# EAGLE board Layout (EAGLE 9.1.3)
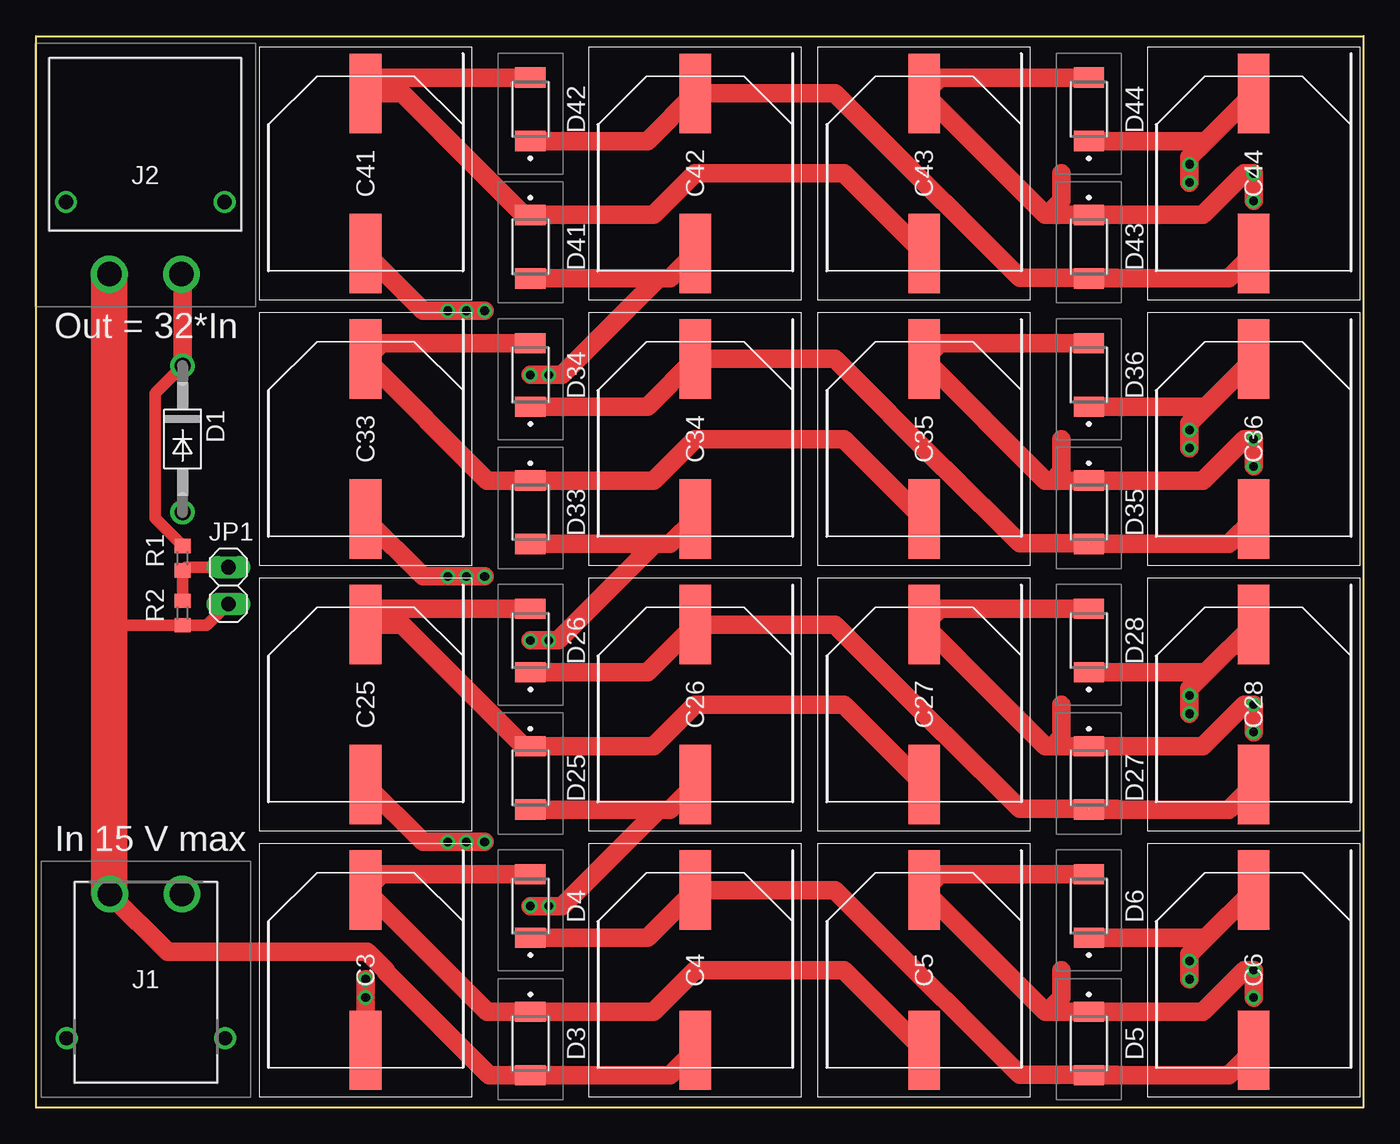
[diagram p0: board, top side]
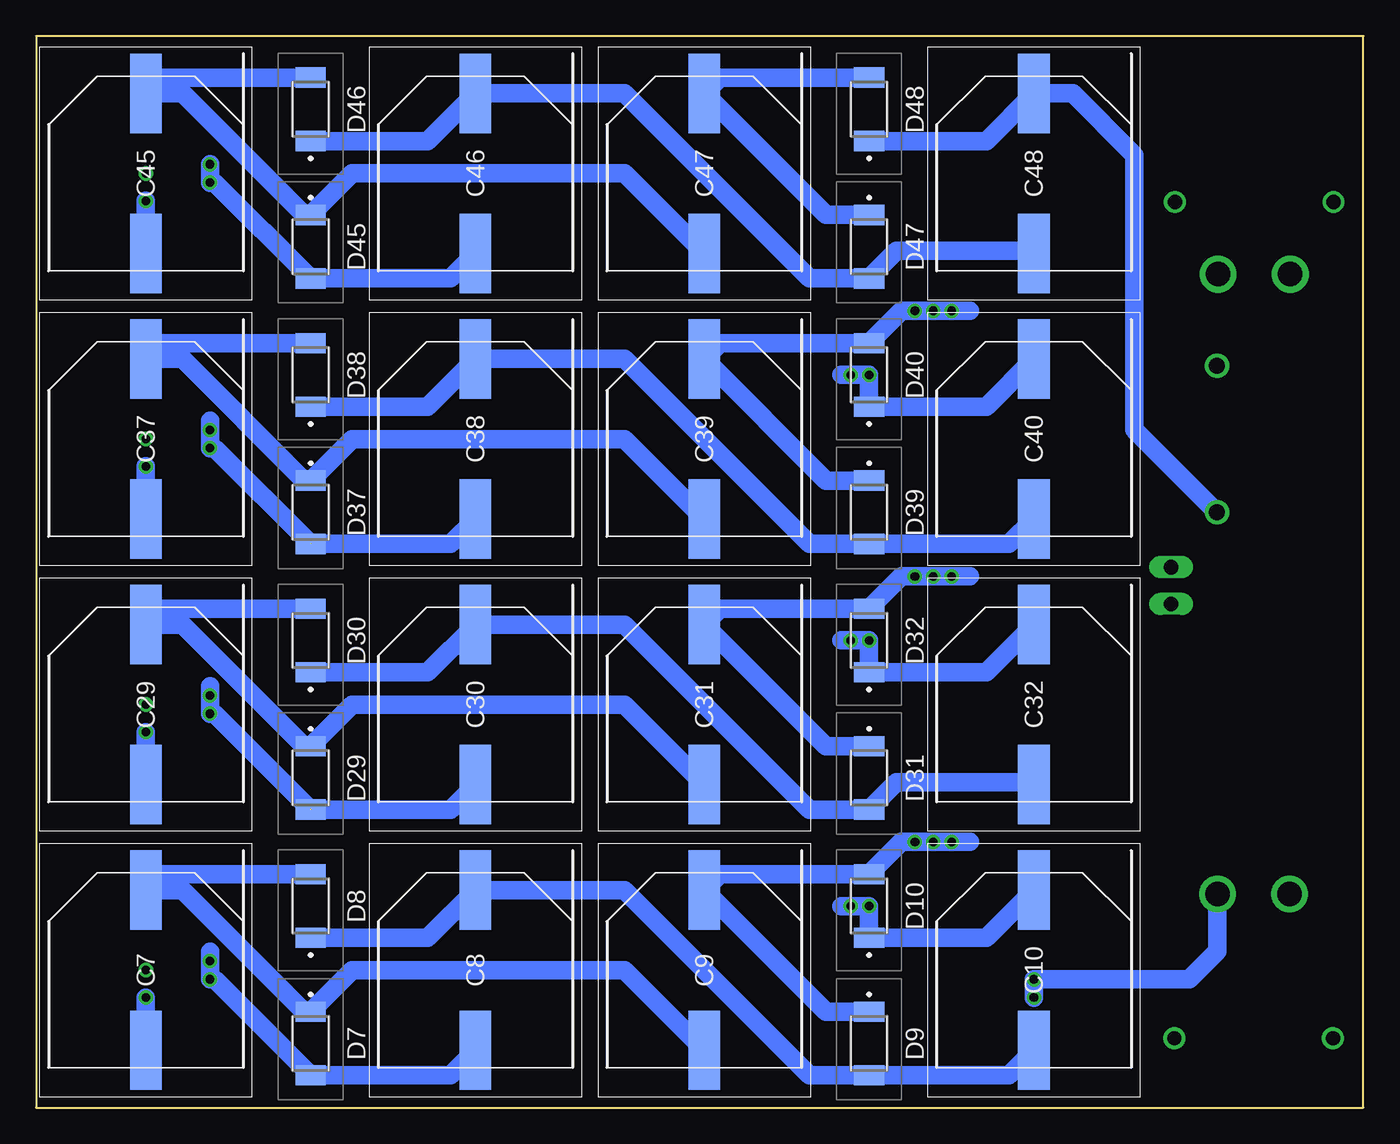
[diagram p1: board, bottom side, seen from below]

Size 92.08 x 74.3 mm. Coordinates in mm from the lower left corner, seen from the top.
Outline: 0,0 0,74.3 92.08,74.3 92.08,0 0,0
Copper layers (1*16): Top 0.035mm / dielectric 1.5mm / Bottom 0.035mm
Design rules "default": minimum track width 6mil, minimum drill 0.35mm, track to track 6mil, track to pad 6mil, pad to pad 6mil, via to via 6mil, smd to smd 6mil, copper to edge 40mil, drill to drill 6mil, minimum pad ring 10mil, minimum via ring 8mil, stop-mask expansion 4mil, vias tented up to drill 0mil, thermal gap 10mil

## Footprints (pad centres in the part's own frame; a part is rotated, then mirrored left to right if it is on the bottom)
CAPAE1350X1400N = smd 5.5 x 2.2: 1 -5.55,0; 2 5.55,0
DO41-10 = drill 1.118: A 5.08,0; C -5.08,0
PMEG3050EP115 = smd 1.4 x 2.1: 1 -2.2,0; 2 2.2,0
XT30PWM = drill 1.7 pad 2.55: 1 -2.5,-5.912; 2 2.5,-5.912 | drill 1 pad 1.5: 3 5.5,4.088; 4 -5.5,4.088
XT30PWF = drill 1.7 pad 2.55: 1 0,0; 2 5,0 | drill 1 pad 1.5: 3 -3,5; 4 8,5
1X02 = drill 1.016 long: 1 -1.27,0; 2 1.27,0
R0603 = smd 1 x 1.1: 1 -0.85,0; 2 0.85,0

## Placement (x,y rotation side)
C3  AFK108M25H32T-F  [CAPAE1350X1400N]  22.86,9.53 270 top
C4  AFK108M25H32T-F  [CAPAE1350X1400N]  45.72,9.53 270 top
C5  AFK108M25H32T-F  [CAPAE1350X1400N]  61.6,9.53 270 top
C6  AFK108M25H32T-F  [CAPAE1350X1400N]  84.45,9.53 270 top
C7  AFK108M25H32T-F  [CAPAE1350X1400N]  84.45,9.53 270 bottom
C8  AFK108M25H32T-F  [CAPAE1350X1400N]  61.6,9.53 270 bottom
C9  AFK108M25H32T-F  [CAPAE1350X1400N]  45.72,9.53 270 bottom
C10  AFK108M25H32T-F  [CAPAE1350X1400N]  22.86,9.53 270 bottom
C25  AFK108M25H32T-F  [CAPAE1350X1400N]  22.86,27.94 270 top
C26  AFK108M25H32T-F  [CAPAE1350X1400N]  45.72,27.94 270 top
C27  AFK108M25H32T-F  [CAPAE1350X1400N]  61.6,27.94 270 top
C28  AFK108M25H32T-F  [CAPAE1350X1400N]  84.45,27.94 270 top
C29  AFK108M25H32T-F  [CAPAE1350X1400N]  84.45,27.94 270 bottom
C30  AFK108M25H32T-F  [CAPAE1350X1400N]  61.6,27.94 270 bottom
C31  AFK108M25H32T-F  [CAPAE1350X1400N]  45.72,27.94 270 bottom
C32  AFK108M25H32T-F  [CAPAE1350X1400N]  22.86,27.94 270 bottom
C33  AFK108M25H32T-F  [CAPAE1350X1400N]  22.86,46.35 270 top
C34  AFK108M25H32T-F  [CAPAE1350X1400N]  45.72,46.35 270 top
C35  AFK108M25H32T-F  [CAPAE1350X1400N]  61.6,46.35 270 top
C36  AFK108M25H32T-F  [CAPAE1350X1400N]  84.45,46.35 270 top
C37  AFK108M25H32T-F  [CAPAE1350X1400N]  84.45,46.35 270 bottom
C38  AFK108M25H32T-F  [CAPAE1350X1400N]  61.6,46.35 270 bottom
C39  AFK108M25H32T-F  [CAPAE1350X1400N]  45.72,46.35 270 bottom
C40  AFK108M25H32T-F  [CAPAE1350X1400N]  22.86,46.35 270 bottom
C41  AFK108M25H32T-F  [CAPAE1350X1400N]  22.86,64.77 270 top
C42  AFK108M25H32T-F  [CAPAE1350X1400N]  45.72,64.77 270 top
C43  AFK108M25H32T-F  [CAPAE1350X1400N]  61.6,64.77 270 top
C44  AFK108M25H32T-F  [CAPAE1350X1400N]  84.45,64.77 270 top
C45  AFK108M25H32T-F  [CAPAE1350X1400N]  84.45,64.77 270 bottom
C46  AFK108M25H32T-F  [CAPAE1350X1400N]  61.6,64.77 270 bottom
C47  AFK108M25H32T-F  [CAPAE1350X1400N]  45.72,64.77 270 bottom
C48  AFK108M25H32T-F  [CAPAE1350X1400N]  22.86,64.77 270 bottom
D1  1N4004  [DO41-10]  10.16,46.35 270 top
D3  PMEG3050EP,115  [PMEG3050EP115]  34.29,4.45 270 top
D4  PMEG3050EP,115  [PMEG3050EP115]  34.29,13.97 90 top
D5  PMEG3050EP,115  [PMEG3050EP115]  73.02,4.45 270 top
D6  PMEG3050EP,115  [PMEG3050EP115]  73.02,13.97 90 top
D7  PMEG3050EP,115  [PMEG3050EP115]  73.02,4.45 270 bottom
D8  PMEG3050EP,115  [PMEG3050EP115]  73.02,13.97 90 bottom
D9  PMEG3050EP,115  [PMEG3050EP115]  34.29,4.45 270 bottom
D10  PMEG3050EP,115  [PMEG3050EP115]  34.29,13.97 90 bottom
D25  PMEG3050EP,115  [PMEG3050EP115]  34.29,22.86 270 top
D26  PMEG3050EP,115  [PMEG3050EP115]  34.29,32.38 90 top
D27  PMEG3050EP,115  [PMEG3050EP115]  73.02,22.86 270 top
D28  PMEG3050EP,115  [PMEG3050EP115]  73.02,32.38 90 top
D29  PMEG3050EP,115  [PMEG3050EP115]  73.02,22.86 270 bottom
D30  PMEG3050EP,115  [PMEG3050EP115]  73.02,32.38 90 bottom
D31  PMEG3050EP,115  [PMEG3050EP115]  34.29,22.86 270 bottom
D32  PMEG3050EP,115  [PMEG3050EP115]  34.29,32.38 90 bottom
D33  PMEG3050EP,115  [PMEG3050EP115]  34.29,41.27 270 top
D34  PMEG3050EP,115  [PMEG3050EP115]  34.29,50.8 90 top
D35  PMEG3050EP,115  [PMEG3050EP115]  73.02,41.27 270 top
D36  PMEG3050EP,115  [PMEG3050EP115]  73.02,50.8 90 top
D37  PMEG3050EP,115  [PMEG3050EP115]  73.02,41.27 270 bottom
D38  PMEG3050EP,115  [PMEG3050EP115]  73.02,50.8 90 bottom
D39  PMEG3050EP,115  [PMEG3050EP115]  34.29,41.27 270 bottom
D40  PMEG3050EP,115  [PMEG3050EP115]  34.29,50.8 90 bottom
D41  PMEG3050EP,115  [PMEG3050EP115]  34.29,59.69 270 top
D42  PMEG3050EP,115  [PMEG3050EP115]  34.29,69.22 90 top
D43  PMEG3050EP,115  [PMEG3050EP115]  73.02,59.69 270 top
D44  PMEG3050EP,115  [PMEG3050EP115]  73.02,69.22 90 top
D45  PMEG3050EP,115  [PMEG3050EP115]  73.02,59.69 270 bottom
D46  PMEG3050EP,115  [PMEG3050EP115]  73.02,69.22 90 bottom
D47  PMEG3050EP,115  [PMEG3050EP115]  34.29,59.69 270 bottom
D48  PMEG3050EP,115  [PMEG3050EP115]  34.29,69.22 90 bottom
J1  XT30PW-M  [XT30PWM]  7.62,8.89 180 top
J2  XT30PW-F  [XT30PWF]  5.08,57.78 0 top
JP1  [1X02]  13.33,36.2 270 top
R1  [R0603]  10.16,38.1 90 top
R2  [R0603]  10.16,34.29 90 top

## Library data of the parts
C3-C10 C25-C48 = AFK158M16H32T-F; ARROW_PART_NUMBER: AFK108M25H32T-F; DESCRIPTION: Aluminium Electrolytic Capacitors - SMD 25V 1000uF 12.5X13.5 AEC-Q200; HEIGHT: 14mm; MANUFACTURER_NAME: Cornell Dubilier; MANUFACTURER_PART_NUMBER: AFK108M25H32T-F; MOUSER_PART_NUMBER: 5985-AFK25V1000-F; MOUSER_PRICE-STOCK: https://www.mouser.co.uk/ProductDetail/Cornell-Dubilier-CDE/AFK108M25H32T-F?qs=lmvG2hi1dvjyxC4H6cSnyg%3D%3D
D1 = diode
D3-D10 D25-D48 = PMEG3050EP_115; ARROW_PART_NUMBER: PMEG3050EP,115; ARROW_PRICE-STOCK: https://www.arrow.com/en/products/pmeg3050ep115/nexperia; DESCRIPTION: NXP PMEG3050EP,115 SMT Schottky Diode, 30V 5A, 2-Pin SOD-128; HEIGHT: 1mm; MANUFACTURER_NAME: Nexperia; MANUFACTURER_PART_NUMBER: PMEG3050EP,115; MOUSER_PART_NUMBER: 771-PMEG3050EP115; MOUSER_PRICE-STOCK: https://www.mouser.co.uk/ProductDetail/Nexperia/PMEG3050EP115?qs=GcY6OjH1zdmnjQ%2FhUT5aOA%3D%3D
J1 = XT30PW-M; ARROW_PART_NUMBER: XT30PW-M; DESCRIPTION: 30A Low Temperature Rise Fire Retardant Plug; HEIGHT: 5mm; MANUFACTURER_NAME: Amass; MANUFACTURER_PART_NUMBER: XT30PW-M
J2 = XT30PW-F; ARROW_PART_NUMBER: XT30PW-F; DESCRIPTION: Socket; DC supply; XT30; female; PIN:2; on PCBs; THT; Colour: yellow; HEIGHT: 5mm; MANUFACTURER_NAME: Amass; MANUFACTURER_PART_NUMBER: XT30PW-F
JP1 = pinhead
R1 R2 = eagle-ltspice; SPICEMODEL: NONE; SPICEPREFIX: R

## Nets
0: C4.2 D3.2 J1.2 J2.1 JP1.2 R2.1
N$1: D1.C J2.2 R1.2
N$2: JP1.1 R1.1 R2.2
N$5: C3.1 C5.2 D3.1 D4.2
N$8: C3.2 J1.1
N$9: C5.1 C7.2 D5.1 D6.2
N$10: C4.1 C6.2 D4.1 D5.2
N$11: C6.1 C8.2 D6.1 D7.2
N$12: C9.1 C25.2 D9.1 D10.2
N$14: C8.1 C10.2 D8.1 D9.2
N$15: C10.1 C26.2 D10.1 D25.2
N$16: C7.1 C9.2 D7.1 D8.2
N$29: C33.1 C35.2 D33.1 D34.2
N$31: C25.1 C27.2 D25.1 D26.2
N$32: C31.1 C33.2 D31.1 D32.2
N$33: C35.1 C37.2 D35.1 D36.2
N$34: C27.1 C29.2 D27.1 D28.2
N$35: C26.1 C28.2 D26.1 D27.2
N$36: C28.1 C30.2 D28.1 D29.2
N$38: C30.1 C32.2 D30.1 D31.2
N$39: C32.1 C34.2 D32.1 D33.2
N$40: C29.1 C31.2 D29.1 D30.2
N$41: C34.1 C36.2 D34.1 D35.2
N$42: C36.1 C38.2 D36.1 D37.2
N$43: C39.1 C41.2 D39.1 D40.2
N$44: C38.1 C40.2 D38.1 D39.2
N$45: C40.1 C42.2 D40.1 D41.2
N$46: C37.1 C39.2 D37.1 D38.2
N$47: C41.1 C43.2 D41.1 D42.2
N$48: C43.1 C45.2 D43.1 D44.2
N$49: C42.1 C44.2 D42.1 D43.2
N$50: C44.1 C46.2 D44.1 D45.2
N$51: C47.1 D47.1 D48.2
N$52: C46.1 C48.2 D46.1 D47.2
N$53: C48.1 D1.A D48.1
N$54: C45.1 C47.2 D45.1 D46.2

## Tracks (layer width: path | path; a pad name or v marks a point on that pad's centre or on a via)
0
  Top 0.813: 5.08,33.66 5.29,33.44 R2.1 11.85,33.44 JP1.2
  Top 1.27: C4.2 43.99,2.25 D3.2 31.41,2.25 24.28,9.37 24.28,9.48 22.97,10.79 9.13,10.79 J1.2
  Top 2.54: J2.1 5.08,33.66 5.08,14.84 J1.2
N$1
  Top 0.813: R1.2 8.26,40.85 8.26,49.53 D1.C
  Top 1.27: J2.2 10.16,57.7 D1.C
N$2
  Top 0.813: R2.2 R1.1 10.38,37.47 JP1.1
N$5
  Top 1.27: D4.2 23.95,16.17 C3.1 31.29,6.64 D3.1 42.84,6.64 45.72,9.53 56.05,9.53 C5.2
N$8  (via drill 0.6)
  Top 1.27: C3.2 22.85,3.96 C3.2 | v22.86,8.89 v22.86,7.62 C3.2
  Bottom 1.27: v22.86,7.62 v22.86,8.89 12.06,8.89 10.12,10.84 J1.1
N$9  (via drill 0.6)
  Top 1.27: D6.2 62.69,16.17 C5.1 70.02,6.64 | 70.02,6.64 D5.1 80.94,6.64 83.82,9.53 v84.45,9.53 v84.45,7.62 | 71.12,8.89 71.12,7.62 | 71.12,9.53 71.12,7.62 | 71.12,7.62 70.14,6.64 70.02,6.64
  Bottom 1.27: C7.2 v84.45,7.62
N$10
  Top 1.27: C6.2 82.72,2.25 D5.2 73.02,2.29 | D4.1 42.42,11.77 C4.1 55.41,15.07 62.97,7.51 63.02,7.51 68.25,2.29 73.02,2.29 | 74.93,2.29 73.02,2.29
N$11  (via drill 0.6)
  Top 1.27: D6.1 81.15,11.77 | 81.15,11.77 C6.1 | v80.01,8.89 v80.01,10.16 80.01,10.63 81.15,11.77
  Bottom 1.27: C8.2 63.33,2.25 D7.2 79.67,8.89 v80.01,8.89 v80.01,10.16 80.01,10.79
N$12  (via drill 0.6)
  Top 1.27: C25.2 26.84,18.41 v28.57,18.41 v29.84,18.41 v31.11,18.41
  Bottom 1.27: D9.1 37.29,6.64 C9.1 44.62,16.17 D10.2 32.05,18.41 v31.11,18.41 v29.84,18.41 v28.57,18.41 27.3,18.41
N$14
  Bottom 1.27: C10.2 24.59,2.25 D9.2 38.44,2.25 51.27,15.07 C8.1 64.9,11.77 D8.1
N$15  (via drill 0.6)
  Top 1.27: D25.2 43.18,20.66 | 43.18,20.66 43.99,20.66 C26.2 | 43.18,20.66 36.49,13.97 v35.56,13.97 v34.29,13.97
  Bottom 1.27: 22.86,17.14 C10.1 26.16,11.77 27.94,11.77 D10.1 v34.29,13.97 v35.56,13.97 36.2,13.97
N$16
  Bottom 1.27: D8.2 83.36,16.17 C7.1 81.91,15.07 73.48,6.64 D7.1 70.14,9.53 51.27,9.53 C9.2
N$29
  Top 1.27: D34.2 23.95,53 C33.1 31.29,43.48 D33.1 42.84,43.48 45.72,46.35 56.05,46.35 C35.2
N$31
  Top 1.27: D26.2 23.95,34.59 C25.1 25.4,33.49 33.83,25.06 D25.1 42.84,25.06 45.72,27.94 56.05,27.94 C27.2
N$32  (via drill 0.6)
  Top 1.27: C33.2 26.84,36.83 v28.57,36.83 v29.84,36.83 v31.11,36.83
  Bottom 1.27: D31.1 37.29,25.06 C31.1 44.62,34.59 D32.2 32.05,36.83 v31.11,36.83 v29.84,36.83 v28.57,36.83 27.3,36.83
N$33  (via drill 0.6)
  Top 1.27: D36.2 62.69,53 C35.1 70.02,43.48 70.48,43.48 | 70.48,43.48 D35.1 80.94,43.48 83.82,46.35 v84.45,46.35 v84.45,44.45 | 71.12,45.72 71.12,44.45 | 71.12,46.35 71.12,44.45 | 71.12,44.45 71.12,44.11 70.48,43.48
  Bottom 1.27: C37.2 v84.45,44.45
N$34  (via drill 0.6)
  Top 1.27: D28.2 62.69,34.59 C27.1 70.02,25.06 70.48,25.06 | 70.48,25.06 D27.1 80.94,25.06 83.82,27.94 v84.45,27.94 v84.45,26.04 | 71.12,27.3 71.12,26.04 | 71.12,27.94 71.12,26.04 | 71.12,26.04 71.12,25.7 70.48,25.06
  Bottom 1.27: C29.2 v84.45,26.04
N$35  (1 unrouted)
  Top 1.27: C28.2 82.72,20.66 D27.2 | D26.1 42.42,30.18 C26.1 55.41,33.49 62.97,25.93 63.02,25.93 68.25,20.7 73.02,20.7 74.93,20.7
N$36  (via drill 0.6)
  Top 1.27: D28.1 81.15,30.18 | 81.15,30.18 C28.1 | v80.01,27.3 v80.01,28.57 80.01,29.05 81.15,30.18
  Bottom 1.27: C30.2 63.33,20.66 D29.2 79.67,27.3 v80.01,27.3 v80.01,28.57 80.01,29.21
N$38
  Bottom 1.27: D30.1 64.9,30.18 C30.1 51.27,33.49 38.44,20.66 D31.2 32.38,22.57 23.04,22.57 C32.2
N$39  (via drill 0.6)
  Top 1.27: D33.2 41.91,39.08 | 41.91,39.08 43.18,39.08 | 43.18,39.08 43.99,39.08 C34.2 | v34.29,32.38 v35.56,32.38 36.2,32.38 41.91,38.1 | 41.91,38.1 41.91,39.08 | 41.91,38.1 42.89,39.08 43.18,39.08
  Bottom 1.27: C32.1 26.16,30.18 D32.1 v34.29,32.38 v35.56,32.38 36.2,32.38
N$40
  Bottom 1.27: D30.2 83.36,34.59 C29.1 81.91,33.49 73.48,25.06 D29.1 70.14,27.94 51.27,27.94 C31.2
N$41  (1 unrouted)
  Top 1.27: C36.2 82.72,39.08 D35.2 | D34.1 42.42,48.6 C34.1 55.41,51.91 62.97,44.34 63.02,44.34 68.25,39.12 73.02,39.12
N$42  (via drill 0.6)
  Top 1.27: D36.1 81.15,48.6 | 81.15,48.6 C36.1 | v80.01,45.72 v80.01,46.99 80.01,47.46 81.15,48.6
  Bottom 1.27: C38.2 63.33,39.08 D37.2 79.67,45.72 v80.01,45.72 v80.01,46.99 80.01,47.62
N$43  (via drill 0.6)
  Top 1.27: C41.2 26.84,55.24 v28.57,55.24 v29.84,55.24 v31.11,55.24
  Bottom 1.27: D39.1 37.29,43.48 C39.1 44.62,53 D40.2 32.05,55.24 v31.11,55.24 v29.84,55.24 v28.57,55.24 27.3,55.24
N$44
  Bottom 1.27: C40.2 24.59,39.08 D39.2 38.44,39.08 51.27,51.91 C38.1 64.9,48.6 D38.1
N$45  (via drill 0.6)
  Top 1.27: D41.2 43.18,57.49 | 43.18,57.49 43.99,57.49 C42.2 | 43.18,57.49 36.49,50.8 v35.56,50.8 v34.29,50.8
  Bottom 1.27: 22.86,53.98 C40.1 26.16,48.6 27.94,48.6 D40.1 v34.29,50.8 v35.56,50.8 36.2,50.8
N$46
  Bottom 1.27: D38.2 83.36,53 C37.1 81.91,51.91 73.48,43.48 D37.1 70.14,46.35 51.27,46.35 C39.2
N$47
  Top 1.27: D42.2 23.95,71.42 C41.1 25.4,70.32 33.83,61.89 D41.1 42.84,61.89 45.72,64.77 56.05,64.77 C43.2
N$48  (via drill 0.6)
  Top 1.27: D44.2 62.69,71.42 C43.1 70.02,61.89 | 70.02,61.89 D43.1 80.94,61.89 83.82,64.77 v84.45,64.77 v84.45,62.87 | 71.12,64.14 71.12,62.87 | 71.12,64.77 71.12,62.87 | 70.02,61.89 70.14,61.89 71.12,62.87
  Bottom 1.27: C45.2 v84.45,62.87
N$49
  Top 1.27: D43.2 74.3,57.49 | 74.3,57.49 74.93,57.49 82.72,57.49 C44.2 | D42.1 42.42,67.02 C42.1 55.41,70.32 62.97,62.76 63.02,62.76 68.25,57.53 73.02,57.53 74.3,57.53 | 74.93,57.53 74.3,57.53 | 74.3,57.53 74.3,57.49
N$50  (via drill 0.6)
  Top 1.27: D44.1 81.15,67.02 | 81.15,67.02 C44.1 | v80.01,64.14 v80.01,65.41 80.01,65.88 81.15,67.02
  Bottom 1.27: C46.2 63.33,57.49 D45.2 79.67,64.14 v80.01,64.14 v80.01,65.41
N$51
  Bottom 1.27: D48.2 44.62,71.42 C47.1 37.29,61.89 D47.1
N$52
  Bottom 1.27: D46.1 64.9,67.02 C46.1 51.27,70.32 38.44,57.49 D47.2 32.38,59.4 23.04,59.4 C48.2
N$53
  Bottom 1.27: D48.1 26.16,67.02 C48.1 20.16,70.32 15.88,66.04 15.88,46.99 D1.A
N$54
  Bottom 1.27: D46.2 83.36,71.42 C45.1 81.91,70.32 73.48,61.89 D45.1 70.14,64.77 51.27,64.77 C47.2

## Text on the board
tPlace: Out = 32*In | In 15 V max